# Altium PCB All-in-One 0.0.0.PcbDoc
Units mm, origin at the board's own origin, x right, y up, seen from the top; angles counter-clockwise.
Board outline 115 x 160 mm, 2 copper layers (Top Layer, Bottom Layer); 89 components, 75 nets, 259 pads, 0 vias.
Unrouted connection lines stored in the file: 167.
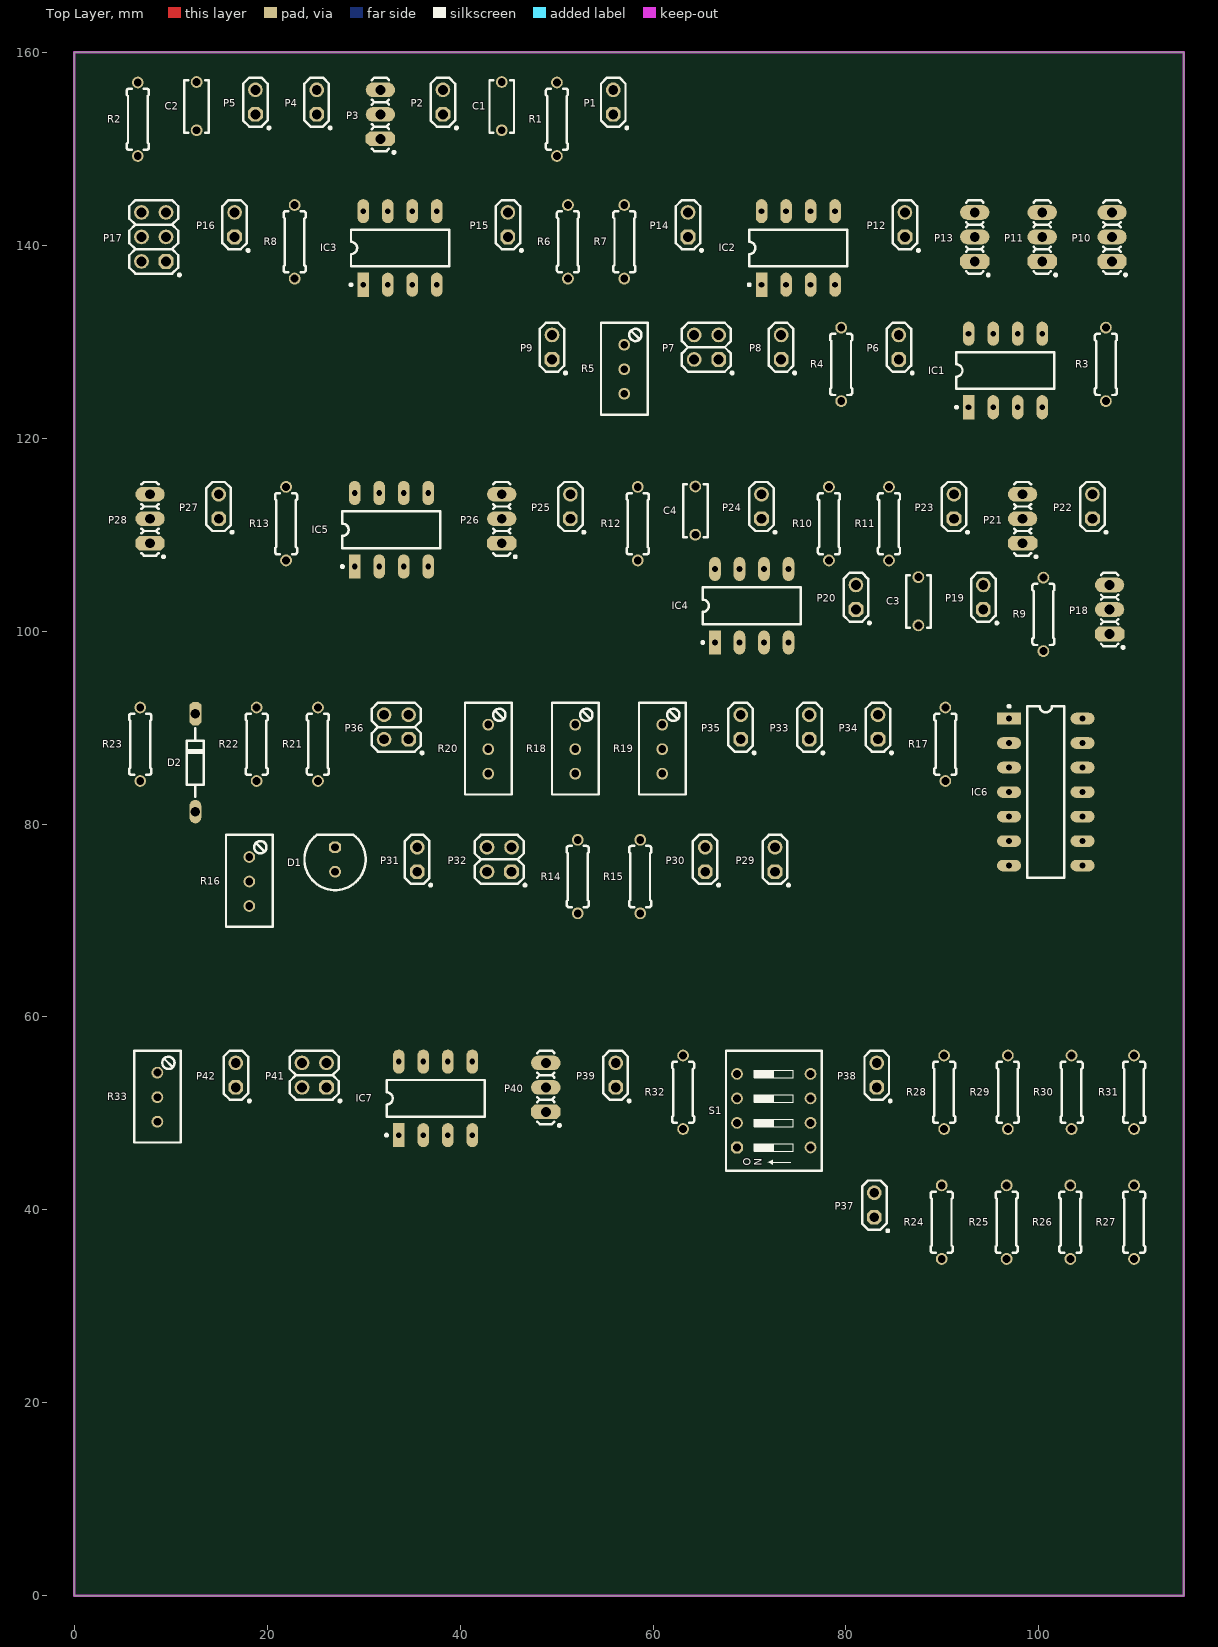
[diagram p0: Top Layer view]
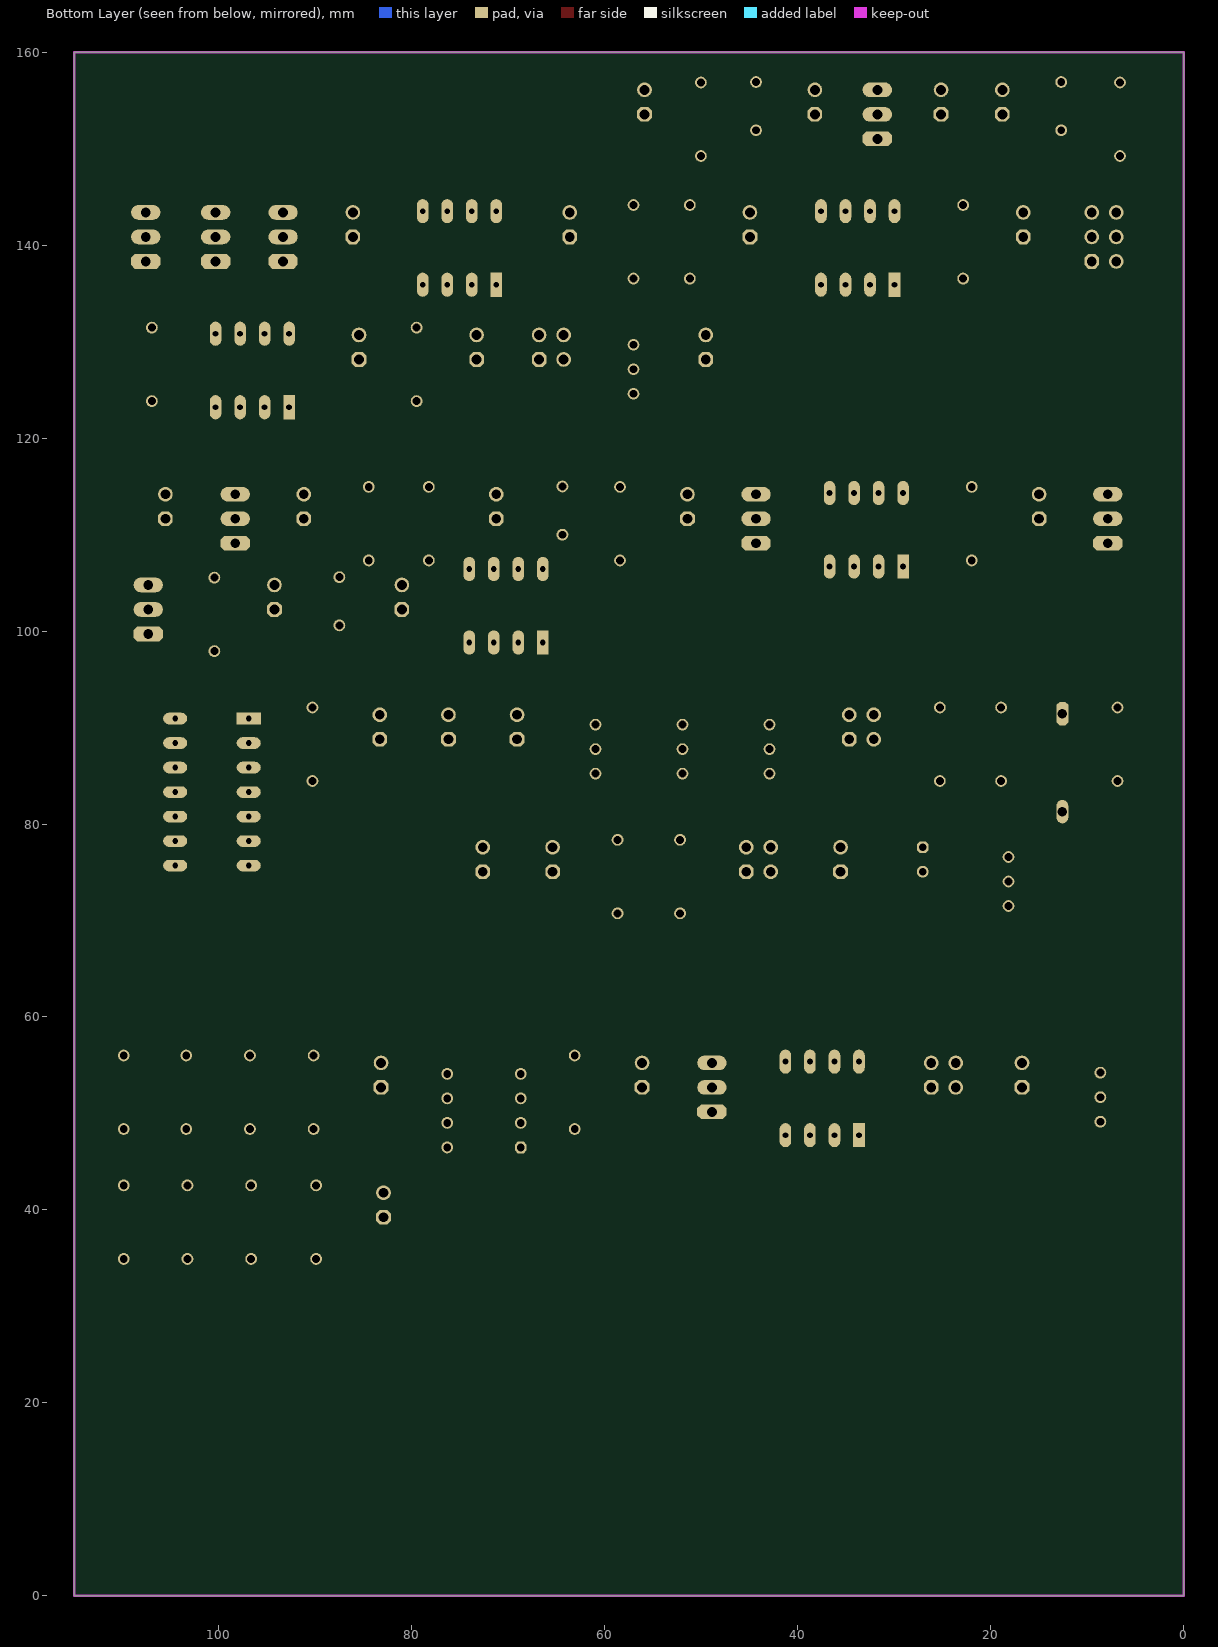
[diagram p1: Bottom Layer view, seen from below]

## Layer stack, top to bottom
Top Solder: solder mask 0.0102, Solder Resist, Dk 3.5
Top Layer: signal copper 0.0356
Dielectric 1: dielectric 0.32, FR-4, Dk 4.8
Bottom Layer: signal copper 0.0356
Bottom Solder: solder mask 0.0102, Solder Resist, Dk 3.5

## Board outline
0,0 115,0 115,160 0,160

## Design rules (kind name [scope] priority, off if disabled: settings)
Clearance [All] p1: gap=0.254
PolygonConnect [All] p1: connectstyle=Relief reliefconductorwidth=0.254 reliefentries=4 polygonreliefangle="90 Angle" airgapwidth=0.254
RoomDefinition "Experiment 5 0.0.0" [InComponentClass('Experiment 5 0.0.0')] p1: confinementstyle=ConfineIn formatcopy=TRUE lockcomponents=FALSE outline 3.048,29.464 113.157,29.464 113.157,56.896 3.048,56.896
RoomDefinition "Experiment 4 0.0.0" [InComponentClass('Experiment 4 0.0.0')] p2: confinementstyle=ConfineIn formatcopy=TRUE lockcomponents=FALSE outline 2.54,62.992 109.093,62.992 109.093,92.964 2.54,92.964
RoomDefinition "Experiment 3 0.0.0" [InComponentClass('Experiment 3 0.0.0')] p3: confinementstyle=ConfineIn formatcopy=TRUE lockcomponents=FALSE outline 3.175,96.52 111.633,96.52 111.633,115.824 3.175,115.824
RoomDefinition "Experiment 2 0.0.0" [InComponentClass('Experiment 2 0.0.0')] p4: confinementstyle=ConfineIn formatcopy=TRUE lockcomponents=FALSE outline 2.667,118.364 111.887,118.364 111.887,145.034 2.667,145.034
RoomDefinition "Experiment 1 0.0.0" [InComponentClass('Experiment 1 0.0.0')] p5: confinementstyle=ConfineIn formatcopy=TRUE lockcomponents=FALSE outline 3.048,148.336 57.658,148.336 57.658,157.734 3.048,157.734
RoutingVias [All] p1: holewidth=0.711 width=1.27 viastyle="Through Hole" minholewidth=0.711 minwidth=1.27 maxholewidth=0.711 maxwidth=1.27
SolderMaskExpansion [All] p1: expansion=0.102
Width [All] p1: maxlimit=0.254 minlimit=0.254 preferedwidth=0.254
30 further rules are at their usual default settings.

## Classes and differential pairs
component class "Experiment 5 0.0.0": IC7 P37 P38 P39 P40 P41 P42 R24 R25 R26 R27 R28 R29 R30 R31 R32 R33 S1
component class "Experiment 4 0.0.0": D1 D2 IC6 P29 P30 P31 P32 P33 P34 P35 P36 R14 R15 R16 R17 R18 R19 R20 R21 R22 R23
component class "Experiment 3 0.0.0": C3 C4 IC4 IC5 P18 P19 P20 P21 P22 P23 P24 P25 P26 P27 P28 R9 R10 R11 R12 R13
component class "Experiment 2 0.0.0": IC1 IC2 IC3 P6 P7 P8 P9 P10 P11 P12 P13 P14 P15 P16 P17 R3 R4 R5 R6 R7 R8
component class "Experiment 1 0.0.0": C1 C2 P1 P2 P3 P4 P5 R1 R2

## Components (designator, comment, footprint, x,y, rotation, side; value= is the part's Value field where it differs from the comment)
C1 "100pF" CAP-H5 44.323,151.892 r90 top
C2 "100pF" CAP-H5 12.7,151.892 r90 top
C3 "10nF" CAP-H5 87.503,100.584 r90 top
C4 "10nF" CAP-H5 64.389,109.982 r90 top
D1 "C5SMF-RJF-CT0W0BB1" LED-5MM 27.051,76.327 r90 top
D2 "1N4148" DO35-10 12.573,86.36 r90 top
IC1 "UA741CP" DIP-8 96.52,127 r90 top
IC2 "UA741CP" DIP-8 75.057,139.7 r90 top
IC3 "UA741CP" DIP-8 33.782,139.7 r90 top
IC4 "UA741CP" DIP-8 70.231,102.616 r90 top
IC5 "UA741CP" DIP-8 32.893,110.49 r90 top
IC6 "LM324SNG" DIP-14 100.711,83.312 r0 top
IC7 "UA741CP" DIP-8 37.465,51.562 r90 top
P1 "VOUT LOW PASS" "PINHD-1X02 ONCE" 55.88,154.813 r90 top
P2 "POWER +" "PINHD-1X02 ONCE" 38.227,154.813 r90 top
P3 "FILTER SELECTOR" PINHD-1X03 31.75,153.543 r90 top
P4 "POWER -" "PINHD-1X02 ONCE" 25.146,154.813 r90 top
P5 "VOUT HIGH PASS" "PINHD-1X02 ONCE" 18.796,154.813 r90 top
P6 "POWER +12V" "PINHD-1X02 ONCE" 85.471,129.413 r90 top
P7 "OFFSET ENABLE" PINHD-2X02 65.532,131.953 r90 top
P8 "OUTPUT" "PINHD-1X02 ONCE" 73.279,129.413 r90 top
P9 "POWER -12V" "PINHD-1X02 ONCE" 49.53,129.413 r90 top
P10 "OPEN/BUFFER SELECTOR" PINHD-1X03 107.569,140.843 r90 top
P11 "INPUT SELECTOR" PINHD-1X03 100.33,140.843 r90 top
P12 "INPUT SIGNAL +" "PINHD-1X02 ONCE" 86.106,142.113 r90 top
P13 "GAIN SELECTOR" PINHD-1X03 93.345,140.843 r90 top
P14 "OUTPUT" "PINHD-1X02 ONCE" 63.627,142.113 r90 top
P15 "INPUT SIGNAL -" "PINHD-1X02 ONCE" 44.958,142.113 r90 top
P16 "OUTPUT" "PINHD-1X02 ONCE" 16.637,142.113 r90 top
P17 "AMPOP SELECTOR" PINHD-2X03 8.255,142.113 r90 top
P18 "SIGNAL/RC SELECTOR" PINHD-1X03 107.315,102.235 r90 top
P19 "POWER +12V" "PINHD-1X02 ONCE" 94.234,103.505 r90 top
P20 "POWER -12V" "PINHD-1X02 ONCE" 81.026,103.505 r90 top
P21 "DC/SCHMITT SELECTOR" PINHD-1X03 98.298,111.633 r90 top
P22 "OUTPUT" "PINHD-1X02 ONCE" 105.537,112.903 r90 top
P23 "INPUT SIGNAL +" "PINHD-1X02 ONCE" 91.186,112.903 r90 top
P24 "INPUT SIGNAL -" "PINHD-1X02 ONCE" 71.247,112.903 r90 top
P25 "INPUT SIGNAL DC" "PINHD-1X02 ONCE" 51.435,112.903 r90 top
P26 "INPUT SELECTOR" PINHD-1X03 44.323,111.633 r90 top
P27 "OUTPUT" "PINHD-1X02 ONCE" 14.986,112.903 r90 top
P28 "INPUT SIGNAL SELECTOR" PINHD-1X03 7.874,111.633 r90 top
P29 "POWER +12V" "PINHD-1X02 ONCE" 72.644,76.327 r90 top
P30 "POWER -12V" "PINHD-1X02 ONCE" 65.405,76.327 r90 top
P31 "INPUT SIGNAL +" "PINHD-1X02 ONCE" 35.56,76.327 r90 top
P32 "SET R2" PINHD-2X02 44.069,78.867 r90 top
P33 "OUTPUT" "PINHD-1X02 ONCE" 76.2,90.043 r90 top
P34 "OUTPUT" "PINHD-1X02 ONCE" 83.312,90.043 r90 top
P35 "INPUT SIGNAL -" "PINHD-1X02 ONCE" 69.088,90.043 r90 top
P36 "SET R4" PINHD-2X02 33.401,92.583 r90 top
P37 "POWER +12V" "PINHD-1X02 ONCE" 82.931,40.513 r90 top
P38 "POWER -12V" "PINHD-1X02 ONCE" 83.185,53.975 r90 top
P39 "GND/5" "PINHD-1X02 ONCE" 56.134,53.975 r90 top
P40 "INPUT SELECTOR" PINHD-1X03 48.895,52.705 r90 top
P41 "OFFSET ENABLE" PINHD-2X02 24.892,56.515 r90 top
P42 "OUTPUT" "PINHD-1X02 ONCE" 16.764,53.975 r90 top
R1 "100k" "R Axial 0.25" 50.038,153.035 r90 top
R2 "100k" "R Axial 0.25" 6.604,153.035 r90 top
R3 "20k" "R Axial 0.25" 106.934,127.635 r90 top
R4 "1k" "R Axial 0.25" 79.502,127.635 r90 top
R5 "10k" PV36W 57.023,127.127 r90 top
R6 "200k" "R Axial 0.25" 51.181,140.335 r90 top
R7 "10k" "R Axial 0.25" 57.023,140.335 r90 top
R8 "1k" "R Axial 0.25" 22.86,140.335 r90 top
R9 "62k" "R Axial 0.25" 100.457,101.727 r90 top
R10 "1k" "R Axial 0.25" 78.232,111.125 r90 top
R11 "39k" "R Axial 0.25" 84.455,111.125 r90 top
R12 "1M" "R Axial 0.25" 58.42,111.125 r90 top
R13 "200k" "R Axial 0.25" 21.971,111.125 r90 top
R14 "10k" "R Axial 0.25" 52.197,74.549 r90 top
R15 "2k" "R Axial 0.25" 58.674,74.549 r90 top
R16 "10k" PV36W 18.161,74.041 r90 top
R17 "15k" "R Axial 0.25" 90.297,88.265 r90 top
R18 "1k" PV36W 51.943,87.757 r90 top
R19 "1k" PV36W 60.96,87.757 r90 top
R20 "10k" PV36W 42.926,87.757 r90 top
R21 "510k" "R Axial 0.25" 25.273,88.265 r90 top
R22 "1k" "R Axial 0.25" 18.923,88.265 r90 top
R23 "1k" "R Axial 0.25" 6.858,88.265 r90 top
R24 "1k" "R Axial 0.25" 89.916,38.735 r90 top
R25 "1k" "R Axial 0.25" 96.647,38.735 r90 top
R26 "1k" "R Axial 0.25" 103.251,38.735 r90 top
R27 "2k" "R Axial 0.25" 109.855,38.735 r90 top
R28 "2k" "R Axial 0.25" 90.17,52.197 r90 top
R29 "2k" "R Axial 0.25" 96.774,52.197 r90 top
R30 "2k" "R Axial 0.25" 103.378,52.197 r90 top
R31 "2k" "R Axial 0.25" 109.855,52.197 r90 top
R32 "240R" "R Axial 0.25" 63.119,52.197 r90 top
R33 "10k" PV36W 8.636,51.689 r90 top
S1 "Digital Selector" DIP-206-4S 72.517,50.292 r90 top

## Footprints (in the part's own frame and the unit in brackets; to place one, negate y for a bottom-side part, rotate by r counter-clockwise, add the part's x,y. Pads: shape width x height; smd on the part's side, far side on the other; paste and mask are expansions set on the pad)
CAP-H5 [mil]
  round 48 hole 32: 1(0,0) 2(196.85,0)
  silkscreen extent -10,-50 205,50, body extent -10,-49 207,49, height 257
DIP-8 [mm]
  rect 2.5x1.2 hole 0.6: 1(-3.81,3.81)
  oval 2.5x1.2 hole 0.6: 2(-3.81,1.27) 3(-3.81,-1.27) 4(-3.81,-3.81) 5(3.81,-3.81) 6(3.81,-1.27) 7(3.81,1.27) 8(3.81,3.81)
  silkscreen extent -3.94,-5.08 1.91,5.21, body extent -3.94,-5.71 3.94,5.71, height 4.44
DIP-14 [mm]
  rect 2.5x1.2 hole 0.6: 1(-3.81,7.62)
  oval 2.5x1.2 hole 0.6: 2(-3.81,5.08) 3(-3.81,2.54) 4(-3.81,0) 5(-3.81,-2.54) 6(-3.81,-5.08) 7(-3.81,-7.62) 8(3.81,-7.62) 9(3.81,-5.08) 10(3.81,-2.54) 11(3.81,0) 12(3.81,2.54) 13(3.81,5.08) 14(3.81,7.62)
  silkscreen extent -3.94,-8.89 1.91,9.02, body extent -4,-9.53 4,9.52, height 4.05
DIP-206-4S [mil]
  oct 48x48 hole 32: 1(-150,150)
  round 48 hole 32: 2(-150,-150) 3(-50,150) 4(-50,-150) 5(50,150) 6(50,-150) 7(150,150) 8(150,-150)
  silkscreen extent -245,-195 245,195, body extent -243,-193 243,193, height 320
DO35-10 [mil]
  oval 96x48 hole 38: A(-200,0)
  oct 96x48 hole 38: C(200,0)
  silkscreen extent -140,-40 140,40, body extent -211,-35 211,35, height 72
LED-5MM [mil]
  round 48 hole 32: 1(-50,0)
  oct 48x48 hole 32: 2(50,0)
  silkscreen extent -125,-125 100,125, body extent -118,-118 98,118, height 352
"PINHD-1X02 ONCE" [mil]
  oct 60x60 hole 40: 1(-50,0)
  round 60 hole 40: 2(50,0)
  silkscreen extent -110,-60 100,50, body extent -100,-50 0,50, height 257
PINHD-1X03 [mil]
  oct 60x120 hole 40: 1(-100,0)
  oval 60x120 hole 40: 2(0,0) 3(100,0)
  silkscreen extent -160,-60 150,35, body extent -150,-50 150,50, height 257
PINHD-2X02 [mil]
  oct 60x60 hole 40: 1(-150,-50)
  round 60 hole 40: 2(-150,50) 3(-50,-50) 4(-50,50)
  silkscreen extent -210,-110 0,100, body extent -200,-100 0,100, height 257
PINHD-2X03 [mil]
  oct 60x60 hole 40: 1(-150,-50)
  round 60 hole 40: 2(-150,50) 3(-50,-50) 4(-50,50) 5(50,-50) 6(50,50)
  silkscreen extent -210,-110 100,100, body extent -200,-100 100,100, height 257
PV36W [mil]
  round 48 hole 32: 1(-100,0) 2(0,0) 3(100,0)
  silkscreen extent -185,-95 190,95, body extent -188,-95 188,95, height 455
"R Axial 0.25" [mil]
  round 48 hole 32: 1(-150,0) 2(150,0)
  silkscreen extent -125,-45 125,45, body extent -162,-47 162,47, height 97

## Part data
C1 C2: library part K101K10X7RF5UH5, "CAP CER 100PF 50V X7R RADIAL"
C3 C4: library part K103K10X7RF5UH5, "CAP CER 10000PF 50V X7R RADIAL"
D1: "LED RED CLEAR 5MM OVAL T/H"
D2: "DIODE GEN PURP 100V 200MA DO35"
IC1 IC2 IC3 IC4 IC5 IC7: "IC OPAMP GP 1MHZ 8DIP"
IC6: "IC OP AMP 4CH 14DIP"
P1 P2 P4 P5 P6 P8 P9 P12 P14 P15 P16 P19 P20 P22 P23 P24 P25 P27 P29 P30 P31 P33 P34 P35 P37 P38 P39 P42: library part "PIN HEADER 1X02 ONCE", "CONN HEADER 2POS .100\" STR TIN"
P3 P10 P11 P13 P18 P21 P26 P28 P40: library part "PIN HEADER 1X03", "CONN HEADER 3POS .100\" STR TIN"
P7 P32 P36 P41: library part "PIN HEADER 2X02", "CONN HEADER 4POS .100\" STR TIN"
P17: library part "PIN HEADER 2X03", "CONN HEADER 6POS .100\" STR TIN"
R1 R2: library part CFR-25JB-52-100K, "RES 100K OHM 1/4W 5% AXIAL"
R3: library part CFR-25JB-52-20K, "RES 20K OHM 1/4W 5% AXIAL"
R4 R8 R10 R22 R23 R24 R25 R26: library part CFR-25JB-52-1K, "RES 1K OHM 1/4W 5% AXIAL"
R5 R16 R20 R33: library part PV36W103C01B00, "TRIMMER 10K OHM 0.5W TH"
R6 R13: library part CFR-25JB-52-200K, "RES 200K OHM 1/4W 5% AXIAL"
R7 R14: library part CFR-25JB-52-10K, "RES 10K OHM 1/4W 5% AXIAL"
R9: library part CFR-25JB-52-62K, "RES 62K OHM 1/4W 5% AXIAL"
R11: library part CFR-25JB-52-39K, "RES 39K OHM 1/4W 5% AXIAL"
R12: library part CFR-25JB-52-1M, "RES 1M OHM 1/4W 5% AXIAL"
R15 R27 R28 R29 R30 R31: library part CFR-25JB-52-2K, "RES 2K OHM 1/4W 5% AXIAL"
R17: library part CFR-25JB-52-15K, "RES 15K OHM 1/4W 5% AXIAL"
R18 R19: library part PV36W102C01B00, "TRIMMER 1K OHM 0.5W TH"
R21: library part CFR-25JB-52-510K, "RES 510K OHM 1/4W 5% AXIAL"
R32: library part CFR-25JB-52-240R, "RES 240 OHM 1/4W 5% AXIAL"
S1: library part 206-4, "SWITCH SLIDE DIP SPST 50MA 24V"

## Nets (pads, with @x,y where several pads share a name; then routed paths per layer and width w, separated by ;. In a path a pad name is that pad's centre, name@x,y a point inside that pad or via, vN(x,y) a via of type N, cw(c..) or ccw(c..) an arc to the next point about the centre after c; other vN are vias at no path point)
+12V/2: IC1.7 IC2.7 IC3.7 P6.1 P6.2
+12V/3: IC4.7 IC5.7 P19.1 P19.2
+12V/4: IC6.4 P29.1 P29.2 P32.2 R14.2 R15.2 R17.2
+12V/5: IC7.7 P37.1 P37.2
-12V/2: IC1.4 IC2.4 IC3.4 P9.1 P9.2 R5.2
-12V/3: IC4.4 IC5.4 P20.1 P20.2
-12V/4: IC6.11 P30.1 P30.2
-12V/5: IC7.4 P38.1 P38.2 R24.1 R28.2 R33.2
GND/1: C1.2 P4.1 P4.2 R2.1
GND/2: IC3.3 P10.3 P11.3 P15.1 P15.2 R4.1
GND/3: C3.1 IC5.3 P24.1 P24.2 R10.1
GND/4: D2.C P35.1 P35.2 R18.2 R18.3 R19.2 R19.3
GND/5: IC7.3 P39.1 P39.2 P40.3 R27.2
NetC1_1: C1.1 P1.1 P1.2 R1.2
NetC2_1: C2.1 P3.3
NetC2_2: C2.2 P5.1 P5.2 R2.2
NetC3_2: C3.2 P18.3 R9.1
NetC4_1: C4.1 IC5.6 P27.1 P27.2 R12.2
NetC4_2: C4.2 IC5.2 R12.1 R13.2
NetD1_1: D1.1 R15.1
NetD1_2: D1.2 IC6.7 P34.1 P34.2 P36.1
NetD2_A: D2.A IC6.10 R14.1
NetIC1_1: IC1.1 P7.2
NetIC1_2: IC1.2 R3.1 R4.2
NetIC1_3: IC1.3 P11.2
NetIC1_5: IC1.5 P7.4
NetIC1_6: IC1.6 P8.1 P8.2 R3.2
NetIC2_2: IC2.2 P10.2
NetIC2_6: IC2.6 P10.1 P14.1 P14.2
NetIC3_2: IC3.2 R6.1 R7.2 R8.2
NetIC3_6: IC3.6 P13.2 P16.1 P16.2
NetIC4_2: IC4.2 P18.2
NetIC4_3: IC4.3 P21.2
NetIC4_6: IC4.6 P22.1 P22.2 P26.1 R9.2 R11.2
NetIC6_1: IC6.1 P33.1 P33.2 R21.2
NetIC6_2: IC6.2 R17.1 R18.1
NetIC6_3: IC6.3 R21.1 R22.2
NetIC6_5: IC6.5 IC6.8 P36.3 R23.2
NetIC6_6: IC6.6 P32.4 R19.1
NetIC6_9: IC6.9 R23.1
NetIC7_1: IC7.1 P41.2
NetIC7_2: IC7.2 P40.2 R32.1
NetIC7_5: IC7.5 P41.4
NetIC7_6: IC7.6 P42.1 P42.2 R32.2
NetP3_1: P3.1 R1.1
NetP7_1: P7.1 R5.1
NetP7_3: P7.3 R5.3
NetP13_1: P13.1 R7.1
NetP13_3: P13.3 R6.2
NetP21_3: P21.3 R10.2 R11.1
NetP26_2: P26.2 R13.1
NetP32_1: P32.1 R16.1 R16.2
NetP32_3: P32.3 R16.3
NetP36_2: P36.2 R20.3
NetP36_4: P36.4 R20.1 R20.2
NetP40_1: P40.1 S1.2 S1.4 S1.6 S1.8
NetP41_1: P41.1 R33.1
NetP41_3: P41.3 R33.3
NetR24_2: R24.2 R25.1 R29.2
NetR25_2: R25.2 R26.1 R30.2
NetR26_2: R26.2 R27.1 R31.2
NetR28_1: R28.1 S1.1
NetR29_1: R29.1 S1.3
NetR30_1: R30.1 S1.5
NetR31_1: R31.1 S1.7
VCC/1: P2.1 P2.2 P3.2
VDC+/3: P21.1 P25.1 P25.2
VIN+.1/2: IC2.3 P17.2
VIN+.1/3: P18.1 P28.1
VIN+.2/2: P11.1 P17.4
VIN+.2/3: P26.3 P28.3
VIN+.3/2: P17.6 R8.1
VIN+/2: P12.1 P12.2 P17.1 P17.3 P17.5
VIN+/3: P23.1 P23.2 P28.2
VIN+/4: P31.1 P31.2 R22.1
pads on no net: IC1.8 IC2.1 IC2.5 IC2.8 IC3.1 IC3.5 IC3.8 IC4.1 IC4.5 IC4.8 IC5.1 IC5.5 IC5.8 IC6.12 IC6.13 IC6.14 IC7.8

## Keep-outs
Keep-Out Layer:
  the board outline again, w0.254

## Text inside footprints (layer, text, board x,y; h text height)
S1: Top Overlay "O / N" at 71.247,44.577 h0.76 r90